# EAGLE board smoke sensor 2.o (EAGLE 9.7.0)

Size 261.26 x 135.41 mm. Coordinates in mm from the lower left corner, seen from the top.
Outline: 0,0 261.26,0 261.26,135.41 0,135.41 0,0
Copper layers (1*16): Top 0.035mm / dielectric 1.5mm / Bottom 0.035mm
Design rules "default": minimum track width 6mil, minimum drill 0.35mm, track to track 6mil, track to pad 6mil, pad to pad 6mil, via to via 6mil, smd to smd 6mil, copper to edge 40mil, drill to drill 6mil, minimum pad ring 10mil, minimum via ring 8mil, stop-mask expansion 4mil, vias tented up to drill 0mil, thermal gap 10mil

## Footprints (pad centres in the part's own frame; a part is rotated, then mirrored left to right if it is on the bottom)
LEDRD254W60D565H860B_G = drill 0.981 pad 1.581: 1 -1.27,0; 2 1.27,0
LEDRD254W60D565H860B_Y = drill 0.981 pad 1.581: 1 -1.27,0; 2 1.27,0
LEDRD254W60D565H860B = drill 0.981 pad 1.581: 1 -1.27,0; 2 1.27,0
MQ-XX-SOCKET = drill 1.27: 1 -6.223,6.223; 2 -8.788,0; 3 -6.223,-6.223; 4 6.223,-6.223; 5 8.788,0; 6 6.223,6.223
LU-5-R = drill 0.8: 1 -6.35,-3.81; 5 3.81,-3.81; 6 6.35,-3.81; 7 6.35,3.81; 8 3.81,3.81; 12 -6.35,3.81
MOTOR = drill 1.118 pad 3.15 octagon: + 2.54,0; - -2.54,0
BATTERY-GENERIC = drill 1.118 pad 3.15 octagon: + 2.54,0; - -2.54,0
PIEZO = drill 1 pad 1.6: 1 -3.5,0; 2 3.5,0
RESAD1016W63L850D250B = drill 0.83 pad 1.43: 1 -5.08,0; 2 5.08,0
SG90 = drill 1.016 long: 1 -2.54,0; 2 0,0; 3 2.54,0
ARDUINO-UNO-R3-SHIELD = drill 1.016 pad 1.88: 3.3V 24.13,-2.54; 5V 24.13,0; A0 24.13,12.7; A1 24.13,15.24; A2 24.13,17.78; A3 24.13,20.32; A4 24.13,22.86; A5 24.13,25.4; AREF -24.13,-13.97; D2 -24.13,20.32; D3 -24.13,17.78; D4 -24.13,15.24; D5 -24.13,12.7; D6 -24.13,10.16; D7 -24.13,7.62; D8 -24.13,3.81; D9 -24.13,1.27; D10 -24.13,-1.27; D11 -24.13,-3.81; D12 -24.13,-6.35; D13 -24.13,-8.89; GND@0 24.13,2.54; GND@1 24.13,5.08; GND@2 -24.13,-11.43; IOREF 24.13,-7.62; NC 24.13,-10.16; RES 24.13,-5.08; RX -24.13,25.4; SCL -24.13,-19.05; SDA -24.13,-16.51; TX -24.13,22.86; VIN 24.13,7.62

## Placement (x,y rotation side)
D1  GREEN  [LEDRD254W60D565H860B_G]  207.33,119.37 180 top
D2  YELLOW  [LEDRD254W60D565H860B_Y]  208.59,103 180 top
D3  RED  [LEDRD254W60D565H860B]  209.49,87.71 180 top
GAS1  GAS-SENSORMQ-XX-SOCKET  [MQ-XX-SOCKET]  95.17,55.14 270 top
K1  RELAY-SPDT_LU-5-R  [LU-5-R]  129.61,90.95 180 top
K2  RELAY-SPDT_LU-5-R  [LU-5-R]  172.32,91.42 180 top
K3  RELAY-SPDT_LU-5-R  [LU-5-R]  250.34,71.82 180 top
M1  MOTOR_HDR  [MOTOR]  128.89,108.22 0 top
M2  MOTOR_HDR  [MOTOR]  171.35,107.14 0 top
P1  BATTERYGENERIC  [BATTERY-GENERIC]  209.49,48.49 180 top
P2  BATTERYGENERIC  [BATTERY-GENERIC]  212.54,8.26 180 top
PIEZO1  PIEZO  [PIEZO]  61.87,121.83 0 top
R1  1k  [RESAD1016W63L850D250B]  90.09,71.65 90 top
R2  1k  [RESAD1016W63L850D250B]  219.31,120.68 90 top
R3  1k  [RESAD1016W63L850D250B]  219.05,103.88 90 top
R4  1k  [RESAD1016W63L850D250B]  219.31,86.82 90 top
R5  220  [RESAD1016W63L850D250B]  68.22,116.75 90 top
SERVO1  SERVOSG90  [SG90]  143.71,65.28 0 top
U1  ARDUINO-UNO-R3-SHIELD  [ARDUINO-UNO-R3-SHIELD]  47.88,51.91 270 top

## Library data of the parts
D1 = Tinkercad; CATEGORY: Opto-Electronic; SUB-CATEGORY: LED; VALUE: LED_GREEN
D2 = Tinkercad; CATEGORY: Opto-Electronic; SUB-CATEGORY: LED; VALUE: LED_YELLOW
D3 = Tinkercad; CATEGORY: Opto-Electronic; SUB-CATEGORY: LED; VALUE: LED_RED
GAS1 K1-K3 M1 M2 P1 P2 PIEZO1 R1-R5 SERVO1 U1 = Tinkercad

## Nets
D1_A: D1.1 R2.2
D2_A: D2.1 R3.2
D3_A: D3.1 R4.2
M1_+: K1.6 M1.+
M2_+: K2.6 M2.+
P1+: K1.1 K2.1 P1.+
P1-: M1.- M2.- P1.-
P2+: K3.12 P2.+
P2-: P2.- PIEZO1.2 R5.1 R5.2
PIEZO1_1: K3.6 PIEZO1.1
U1_5V: GAS1.4 GAS1.5 GAS1.6 SERVO1.2 U1.5V
U1_A0: GAS1.1 GAS1.3 R1.1 U1.A0
U1_D2: K1.5 U1.D2
U1_D3: K2.5 U1.D3
U1_D6: SERVO1.3 U1.D6
U1_D8: K3.8 U1.D8
U1_D11: R4.1 U1.D11
U1_D12: R3.1 U1.D12
U1_D13: R2.1 U1.D13
U1_GND: D1.2 D2.2 D3.2 GAS1.2 K1.8 K2.8 K3.5 R1.2 SERVO1.1 U1.GND@0 U1.GND@1 U1.GND@2

## Tracks (layer width: path | path; a pad name or v marks a point on that pad's centre or on a via)
D1_A  (1 unrouted)
D2_A  (1 unrouted)
D3_A  (1 unrouted)
M1_+  (1 unrouted)
M2_+  (1 unrouted)
P1+  (2 unrouted)
P1-  (2 unrouted)
P2+  (1 unrouted)
P2-  (3 unrouted)
PIEZO1_1  (1 unrouted)
U1_5V  (4 unrouted)
U1_A0  (3 unrouted)
U1_D2  (1 unrouted)
U1_D3  (1 unrouted)
U1_D6  (1 unrouted)
U1_D8  (1 unrouted)
U1_D11  (1 unrouted)
U1_D12  (1 unrouted)
U1_D13  (1 unrouted)
U1_GND  (11 unrouted)